# Altium PCB FinalPCB.PcbDoc (part 3 of 4)
Units mm, origin at the board's own origin, x right, y up, seen from the top; angles counter-clockwise.
Board outline 693.67 x 556.39 mm, 2 copper layers (Top Layer, Bottom Layer); 54 components, 53 nets, 276 pads, 0 vias.
Unrouted connection lines stored in the file: 5.
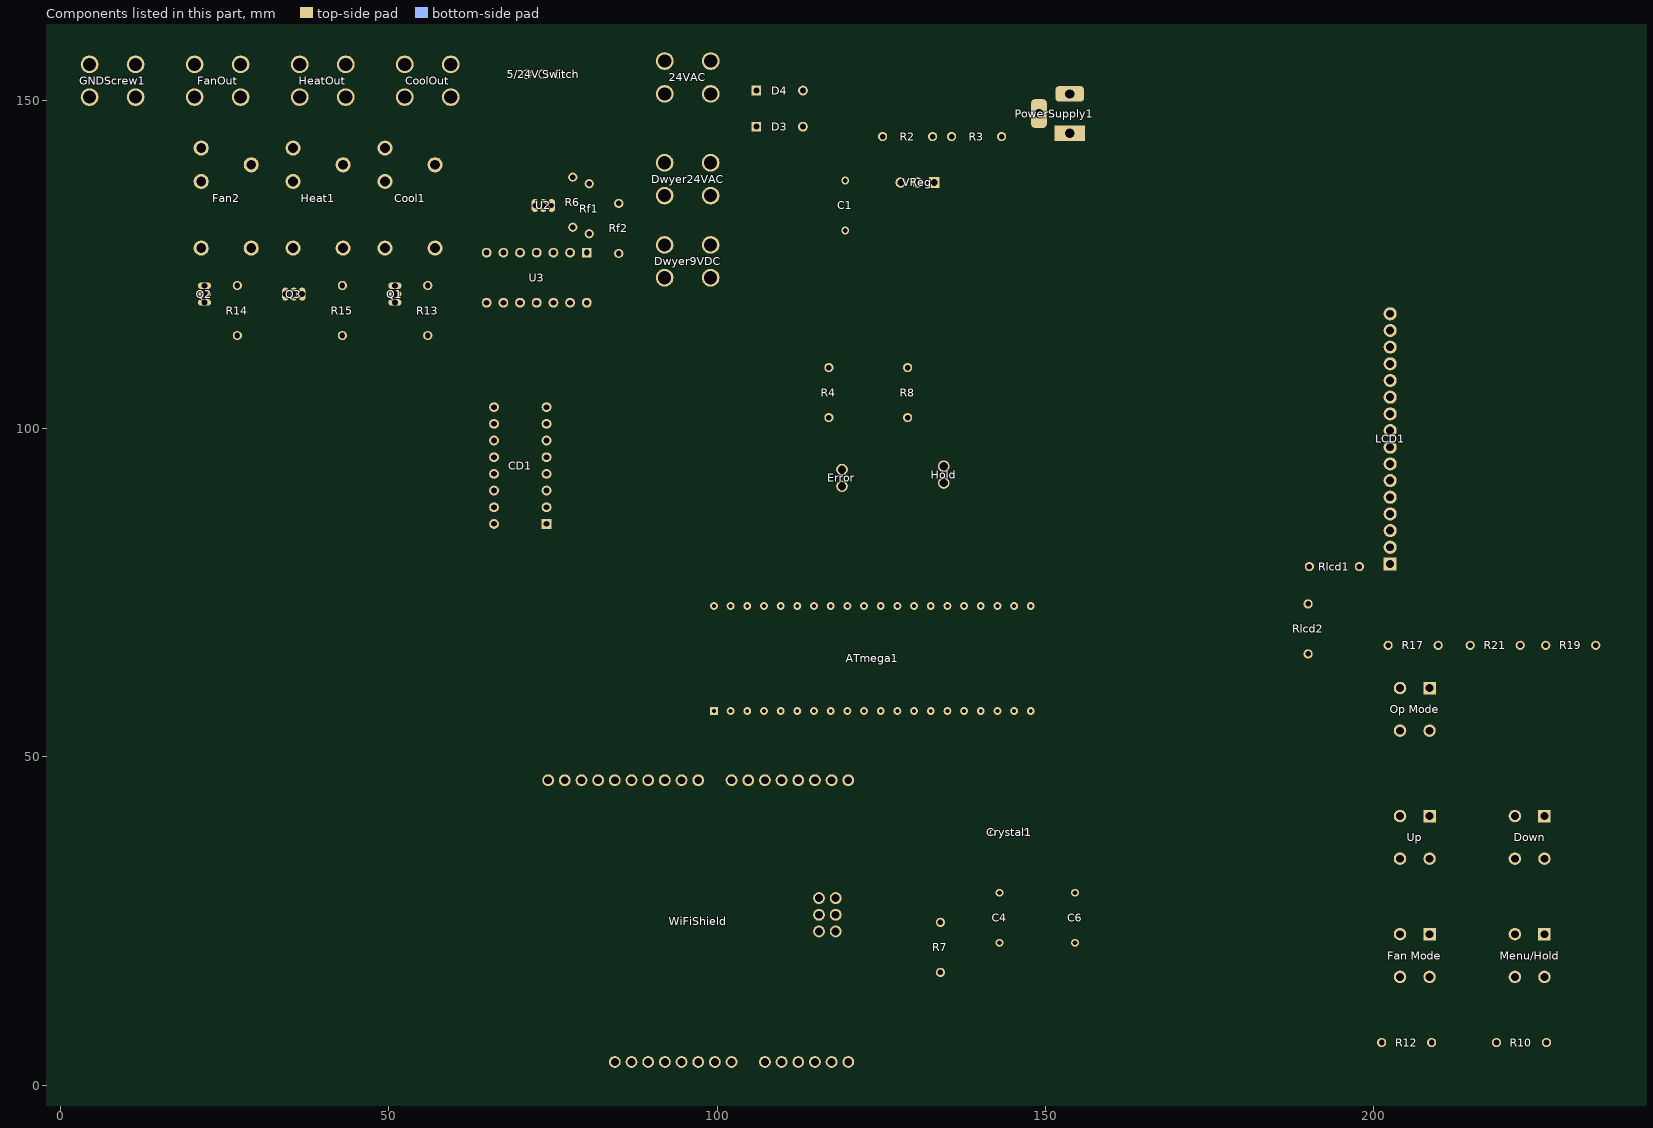
[diagram p3: the components of this part, seen from the top]

## Nets (pads, with @x,y where several pads share a name; then routed paths per layer and width w, separated by ;. In a path a pad name is that pad's centre, name@x,y a point inside that pad or via, vN(x,y) a via of type N, cw(c..) or ccw(c..) an arc to the next point about the centre after c; other vN are vias at no path point) (continued)
copper on no net: (continued)
  Top Layer w0.025: 153.619,115.326 153.619,116.215 ; 153.644,113.624 153.644,114.513 ; 153.644,115.326 153.644,116.215 ; 153.669,113.624 153.669,114.513 ; 153.669,115.326 153.669,116.215 ; 153.695,113.624 153.695,114.513 ; 153.695,115.326 153.695,116.215 ; 153.72,113.624 153.72,114.513 ; 153.72,115.326 153.72,116.215 ; 153.746,113.624 153.746,114.513 ; 153.746,115.326 153.746,116.215 ; 153.746,133.792 153.746,134.782 ; 153.771,113.624 153.771,114.513 ; 153.771,115.326 153.771,116.215 ; 153.771,133.792 153.771,134.782 ; 153.796,113.624 153.796,114.513 ; 153.796,115.326 153.796,116.215 ; 153.796,133.792 153.796,134.782 ; 153.822,113.624 153.822,114.513 ; 153.822,115.326 153.822,116.215 ; 153.822,133.792 153.822,134.782 ; 153.847,113.624 153.847,114.513 ; 153.847,115.326 153.847,116.215 ; 153.847,133.792 153.847,134.782 ; 153.873,113.624 153.873,114.513 ; 153.873,115.326 153.873,116.215 ; 153.873,133.792 153.873,134.782 ; 153.898,113.624 153.898,114.513 ; 153.898,115.326 153.898,116.215 ; 153.898,133.792 153.898,134.782 ; 153.923,113.624 153.923,114.513 ; 153.923,115.326 153.923,116.215 ; 153.923,133.792 153.923,134.782 ; 153.949,113.624 153.949,114.513 ; 153.949,115.326 153.949,116.215 ; 153.949,133.792 153.949,134.782 ; 153.974,113.624 153.974,114.513 ; 153.974,115.326 153.974,116.215 ; 153.974,133.792 153.974,134.782 ; 154,113.624 154,114.513 ; 154,115.326 154,116.215 ; 154,133.792 154,134.782 ; 154.025,113.624 154.025,114.513 ; 154.025,115.326 154.025,116.215 ; 154.025,133.792 154.025,134.782 ; 154.05,113.624 154.05,114.513 ; 154.05,115.326 154.05,116.215 ; 154.05,133.792 154.05,134.782 ; 154.076,113.624 154.076,114.513 ; 154.076,115.326 154.076,116.215 ; 154.076,133.792 154.076,134.782 ; 154.101,113.624 154.101,114.513 ; 154.101,115.326 154.101,116.215 ; 154.101,133.792 154.101,134.782 ; 154.127,113.624 154.127,114.513 ; 154.127,115.326 154.127,116.215 ; 154.127,133.792 154.127,134.782 ; 154.152,113.624 154.152,114.513 ; 154.152,115.326 154.152,116.215 ; 154.152,133.792 154.152,134.782 ; 154.177,113.624 154.177,114.513 ; 154.177,115.326 154.177,116.215 ; 154.177,133.589 154.177,135.189 ; 154.203,113.624 154.203,114.513 ; 154.203,115.326 154.203,116.215 ; 154.203,133.589 154.203,135.189 ; 154.228,113.624 154.228,114.513 ; 154.228,115.326 154.228,116.215 ; 154.228,133.589 154.228,135.189 ; 154.254,113.624 154.254,114.513 ; 154.254,115.326 154.254,116.215 ; 154.254,133.589 154.254,135.189 ; 154.279,113.624 154.279,114.513 ; 154.279,115.326 154.279,116.215 ; 154.279,133.487 154.279,135.29 ; 154.304,113.624 154.304,114.513 ; 154.304,115.326 154.304,116.215 ; 154.304,133.487 154.304,135.29 ; 154.33,113.624 154.33,114.513 ; 154.33,115.326 154.33,116.215 ; 154.33,133.487 154.33,135.29 ; 154.355,113.624 154.355,114.513 ; 154.355,115.326 154.355,116.215 ; 154.355,133.487 154.355,135.29 ; 154.381,113.624 154.381,114.513 ; 154.381,115.326 154.381,116.215 ; 154.381,133.487 154.381,135.29 ; 154.406,113.624 154.406,114.513 ; 154.406,115.326 154.406,116.215 ; 154.406,133.487 154.406,135.29 ; 154.431,113.624 154.431,114.513 ; 154.431,115.326 154.431,116.215 ; 154.431,133.487 154.431,135.29 ; 154.457,113.624 154.457,114.513 ; 154.457,115.326 154.457,116.215 ; 154.457,133.487 154.457,135.29 ; 154.482,113.624 154.482,114.513 ; 154.482,115.326 154.482,116.215 ; 154.482,133.487 154.482,135.29 ; 154.508,113.624 154.508,114.513 ; 154.508,115.326 154.508,116.215 ; 154.508,133.487 154.508,135.29 ; 154.533,113.624 154.533,114.513 ; 154.533,115.326 154.533,116.215 ; 154.533,133.487 154.533,135.29 ; 154.558,113.624 154.558,114.513 ; 154.558,115.326 154.558,116.215 ; 154.558,133.487 154.558,135.29 ; 154.584,113.624 154.584,114.513 ; 154.584,115.326 154.584,116.215 ; 154.584,133.487 154.584,135.29 ; 154.609,113.624 154.609,114.513 ; 154.609,115.326 154.609,116.215 ; 154.609,133.487 154.609,135.29 ; 154.635,113.624 154.635,114.513 ; 154.635,115.326 154.635,116.215 ; 154.635,133.487 154.635,135.29 ; 154.66,113.624 154.66,114.513 ; 154.66,115.326 154.66,116.215 ; 154.66,133.487 154.66,135.29 ; 154.685,113.624 154.685,114.513 ; 154.685,115.326 154.685,116.215 ; 154.685,133.487 154.685,135.29 ; 154.711,113.624 154.711,114.513 ; 154.711,115.326 154.711,116.215 ; 154.711,133.487 154.711,135.29 ; 154.736,113.624 154.736,114.513 ; 154.736,115.326 154.736,116.215 ; 154.736,133.487 154.736,135.29 ; 154.762,113.624 154.762,114.513 ; 154.762,115.326 154.762,116.215 ; 154.762,133.487 154.762,135.29 ; 154.787,113.624 154.787,114.513 ; 154.787,115.326 154.787,116.215 ; 154.787,133.487 154.787,135.29 ; 154.812,113.624 154.812,135.29 ; 154.838,113.624 154.838,135.29 ; 154.863,113.624 154.863,135.29 ; 154.889,113.624 154.889,135.29 ; 154.914,113.624 154.914,135.29 ; 154.939,113.624 154.939,135.29 ; 154.965,113.624 154.965,135.29 ; 154.99,113.624 154.99,135.29 ; 155.016,113.624 155.016,135.29 ; 155.041,113.624 155.041,135.29 ; 155.066,113.624 155.066,135.29 ; 155.092,113.624 155.092,135.29 ; 155.117,113.624 155.117,135.29 ; 155.143,113.624 155.143,135.29 ; 155.168,113.624 155.168,135.29 ; 155.193,113.624 155.193,135.29 ; 155.219,113.624 155.219,135.29 ; 155.244,113.624 155.244,135.29 ; 155.27,113.624 155.27,135.29 ; 155.295,113.624 155.295,135.29 ; 155.32,113.624 155.32,135.29 ; 155.346,113.624 155.346,135.29 ; 155.371,113.624 155.371,135.29 ; 155.397,113.624 155.397,135.29 ; 155.422,113.624 155.422,135.29 ; 155.447,113.624 155.447,114.513 ; 155.447,115.326 155.447,116.215 ; 155.447,133.487 155.447,135.189 ; 155.473,113.624 155.473,114.513 ; 155.473,115.326 155.473,116.215 ; 155.473,133.487 155.473,135.189 ; 155.498,113.624 155.498,114.513 ; 155.498,115.326 155.498,116.215 ; 155.498,133.487 155.498,135.189 ; 155.524,113.624 155.524,114.513 ; 155.524,115.326 155.524,116.215 ; 155.524,133.487 155.524,135.189 ; 155.549,113.624 155.549,114.513 ; 155.549,115.326 155.549,116.215 ; 155.549,133.487 155.549,135.189 ; 155.574,113.624 155.574,114.513 ; 155.574,115.326 155.574,116.215 ; 155.574,133.487 155.574,135.189 ; 155.6,113.624 155.6,114.513 ; 155.6,115.326 155.6,116.215 ; 155.6,133.487 155.6,135.189 ; 155.625,113.624 155.625,114.513 ; 155.625,115.326 155.625,116.215 ; 155.625,133.487 155.625,135.189 ; 155.651,113.624 155.651,114.513 ; 155.651,115.326 155.651,116.215 ; 155.651,133.487 155.651,135.189 ; 155.676,113.624 155.676,114.513 ; 155.676,115.326 155.676,116.215 ; 155.676,133.487 155.676,135.189 ; 155.701,113.624 155.701,114.513 ; 155.701,115.326 155.701,116.215 ; 155.701,133.487 155.701,135.189 ; 155.727,113.624 155.727,114.513 ; 155.727,115.326 155.727,116.215 ; 155.727,133.487 155.727,135.189 ; 155.752,113.624 155.752,114.513 ; 155.752,115.326 155.752,116.215 ; 155.752,133.487 155.752,135.189 ; 155.778,113.624 155.778,114.513 ; 155.778,115.326 155.778,116.215 ; 155.778,133.487 155.778,135.189 ; 155.803,113.624 155.803,114.513 ; 155.803,115.326 155.803,116.215 ; 155.803,133.487 155.803,135.189 ; 155.828,113.624 155.828,114.513 ; 155.828,115.326 155.828,116.215 ; 155.828,133.487 155.828,135.189 ; 155.854,113.624 155.854,114.513 ; 155.854,115.326 155.854,116.215 ; 155.854,133.487 155.854,135.189 ; 155.879,113.624 155.879,114.513 ; 155.879,115.326 155.879,116.215 ; 155.879,117.409 155.879,118.78 ; 155.879,118.984 155.879,119.288 ; 155.879,130.109 155.879,130.82 ; 155.879,133.487 155.879,135.189 ; 155.905,113.624 155.905,114.513 ; 155.905,115.326 155.905,116.215 ; 155.905,117.409 155.905,118.78 ; 155.905,118.984 155.905,119.288 ; 155.905,130.109 155.905,130.82 ; 155.905,133.487 155.905,135.189 ; 155.93,113.624 155.93,114.513 ; 155.93,115.326 155.93,116.215 ; 155.93,117.409 155.93,118.78 ; 155.93,118.984 155.93,119.288 ; 155.93,130.109 155.93,130.82 ; 155.93,133.487 155.93,135.189 ; 155.955,113.624 155.955,114.513 ; 155.955,115.326 155.955,116.215 ; 155.955,117.409 155.955,118.78 ; 155.955,118.984 155.955,119.288 ; 155.955,130.109 155.955,130.82 ; 155.955,133.487 155.955,135.189 ; 155.981,113.624 155.981,114.513 ; 155.981,115.326 155.981,116.215 ; 155.981,117.409 155.981,118.78 ; 155.981,118.984 155.981,119.288 ; 155.981,130.109 155.981,130.82 ; 155.981,133.487 155.981,135.189 ; 156.006,113.624 156.006,114.513 ; 156.006,115.326 156.006,116.215 ; 156.006,117.409 156.006,118.78 ; 156.006,118.984 156.006,119.288 ; 156.006,130.109 156.006,130.82 ; 156.006,133.487 156.006,135.189 ; 156.032,113.624 156.032,114.513 ; 156.032,115.326 156.032,116.215 ; 156.032,117.409 156.032,118.78 ; 156.032,118.984 156.032,119.288 ; 156.032,130.109 156.032,130.82 ; 156.032,133.487 156.032,135.189 ; 156.057,113.624 156.057,114.513 ; 156.057,115.326 156.057,116.215 ; 156.057,117.409 156.057,118.78 ; 156.057,118.984 156.057,119.288 ; 156.057,130.109 156.057,130.82 ; 156.057,133.487 156.057,135.189 ; 156.082,113.624 156.082,114.513 ; 156.082,115.326 156.082,116.215 ; 156.082,117.409 156.082,118.78 ; 156.082,118.984 156.082,119.288 ; 156.082,130.109 156.082,130.82 ; 156.082,133.487 156.082,135.189 ; 156.108,113.624 156.108,114.513 ; 156.108,115.326 156.108,116.215 ; 156.108,117.409 156.108,118.78 ; 156.108,118.984 156.108,119.288 ; 156.108,130.109 156.108,130.82 ; 156.108,133.487 156.108,135.189 ; 156.133,113.624 156.133,114.513 ; 156.133,115.326 156.133,116.215 ; 156.133,117.409 156.133,118.78 ; 156.133,118.984 156.133,119.288 ; 156.133,130.109 156.133,130.82 ; 156.133,133.487 156.133,135.189 ; 156.159,113.624 156.159,114.513 ; 156.159,115.326 156.159,116.215 ; 156.159,117.409 156.159,118.78 ; 156.159,118.984 156.159,119.288 ; 156.159,130.109 156.159,130.82 ; 156.159,133.487 156.159,135.189 ; 156.184,113.624 156.184,114.513 ; 156.184,115.326 156.184,116.215 ; 156.184,117.409 156.184,118.78 ; 156.184,118.984 156.184,119.288 ; 156.184,130.109 156.184,130.82 ; 156.184,133.487 156.184,135.189 ; 156.209,113.624 156.209,114.513 ; 156.209,115.326 156.209,116.215 ; 156.209,117.409 156.209,118.78 ; 156.209,118.984 156.209,119.288 ; 156.209,130.109 156.209,130.82 ; 156.209,133.487 156.209,135.189 ; 156.235,113.624 156.235,114.513 ; 156.235,115.326 156.235,116.215 ; 156.235,117.409 156.235,118.78 ; 156.235,118.984 156.235,119.288 ; 156.235,130.109 156.235,130.82 ; 156.235,133.487 156.235,135.189 ; 156.26,113.624 156.26,114.513 ; 156.26,115.326 156.26,116.215 ; 156.26,117.409 156.26,118.78 ; 156.26,118.984 156.26,119.288 ; 156.26,130.109 156.26,130.82 ; 156.26,133.487 156.26,135.189 ; 156.286,113.624 156.286,114.513 ; 156.286,115.326 156.286,116.215 ; 156.286,117.409 156.286,118.78 ; 156.286,118.984 156.286,119.288 ; 156.286,130.109 156.286,130.82 ; 156.286,133.487 156.286,135.189 ; 156.311,113.624 156.311,114.513 ; 156.311,115.326 156.311,116.215 ; 156.311,117.409 156.311,118.78 ; 156.311,118.984 156.311,119.288 ; 156.311,123.556 156.311,123.962 ; 156.311,130.109 156.311,130.82 ; 156.311,133.792 156.311,134.782 ; 156.336,113.624 156.336,114.513 ; 156.336,115.326 156.336,116.215 ; 156.336,117.409 156.336,118.78 ; 156.336,118.984 156.336,119.288 ; 156.336,123.556 156.336,123.962 ; 156.336,130.109 156.336,130.82 ; 156.336,133.792 156.336,134.782 ; 156.362,113.624 156.362,114.513 ; 156.362,115.326 156.362,116.215 ; 156.362,117.409 156.362,118.78 ; 156.362,118.984 156.362,119.288 ; 156.362,123.556 156.362,123.962 ; 156.362,130.109 156.362,130.82 ; 156.362,133.792 156.362,134.782 ; 156.387,113.624 156.387,114.513 ; 156.387,115.326 156.387,116.215 ; 156.387,117.409 156.387,118.78 ; 156.387,118.984 156.387,119.288 ; 156.387,123.556 156.387,123.962 ; 156.387,130.109 156.387,130.82 ; 156.387,133.792 156.387,134.782 ; 156.413,113.624 156.413,114.513 ; 156.413,115.326 156.413,116.215 ; 156.413,117.409 156.413,117.891 ; 156.413,118.984 156.413,119.288 ; 156.413,123.556 156.413,123.962 ; 156.438,113.624 156.438,114.513 ; 156.438,115.326 156.438,116.215 ; 156.438,117.409 156.438,117.891 ; 156.438,118.984 156.438,119.288 ; 156.438,123.556 156.438,123.962 ; 156.463,113.624 156.463,114.513 ; 156.463,115.326 156.463,116.215 ; 156.463,117.409 156.463,117.891 ; 156.463,118.984 156.463,119.288 ; 156.463,123.556 156.463,123.962 ; 156.489,113.624 156.489,114.513 ; 156.489,115.326 156.489,116.215 ; 156.489,117.409 156.489,117.891 ; 156.489,118.984 156.489,119.288 ; 156.489,123.556 156.489,123.962 ; 156.514,113.624 156.514,114.513 ; 156.514,115.326 156.514,116.215 ; 156.514,117.409 156.514,117.891 ; 156.514,118.984 156.514,119.288 ; 156.514,123.556 156.514,123.962 ; 156.54,113.624 156.54,114.513 ; 156.54,115.326 156.54,116.215 ; 156.54,117.409 156.54,117.891 ; 156.54,118.984 156.54,119.288 ; 156.54,123.556 156.54,123.962 ; 156.565,113.624 156.565,114.513 ; 156.565,115.326 156.565,116.215 ; 156.565,117.409 156.565,117.891 ; 156.565,118.984 156.565,119.288 ; 156.565,123.556 156.565,123.962 ; 156.59,113.624 156.59,114.513 ; 156.59,115.326 156.59,116.215 ; 156.59,117.409 156.59,117.891 ; 156.59,118.984 156.59,119.288 ; 156.59,123.556 156.59,123.962 ; 156.616,113.624 156.616,114.513 ; 156.616,115.326 156.616,116.215 ; 156.616,117.409 156.616,117.891 ; 156.616,118.984 156.616,119.288 ; 156.616,123.556 156.616,123.962 ; 156.641,113.624 156.641,114.513 ; 156.641,115.326 156.641,116.215 ; 156.641,117.409 156.641,117.891 ; 156.641,118.984 156.641,119.288 ; 156.641,123.556 156.641,123.962 ; 156.667,113.624 156.667,114.513 ; 156.667,115.326 156.667,116.215 ; 156.667,117.409 156.667,117.891 ; 156.667,118.984 156.667,119.288 ; 156.667,123.556 156.667,123.962 ; 156.692,113.624 156.692,114.513 ; 156.692,115.326 156.692,116.215 ; 156.692,117.409 156.692,117.891 ; 156.692,118.984 156.692,119.288 ; 156.692,123.556 156.692,123.962 ; 156.717,113.624 156.717,114.513 ; 156.717,115.326 156.717,116.215 ; 156.717,117.409 156.717,117.891 ; 156.717,118.984 156.717,119.288 ; 156.717,123.556 156.717,123.962 ; 156.743,113.624 156.743,114.513 ; 156.743,115.326 156.743,116.215 ; 156.743,117.409 156.743,117.891 ; 156.743,118.984 156.743,119.288 ; 156.743,123.556 156.743,123.962 ; 156.768,113.624 156.768,114.513 ; 156.768,115.326 156.768,116.215 ; 156.768,117.409 156.768,117.891 ; 156.768,118.984 156.768,119.288 ; 156.768,123.556 156.768,123.962 ; 156.794,113.624 156.794,114.513 ; 156.794,115.326 156.794,116.215 ; 156.794,117.409 156.794,117.891 ; 156.794,118.984 156.794,119.288 ; 156.794,123.556 156.794,123.962 ; 156.819,113.624 156.819,114.513 ; 156.819,115.326 156.819,116.215 ; 156.819,117.409 156.819,117.891 ; 156.819,118.984 156.819,119.288 ; 156.819,123.556 156.819,123.962 ; 156.844,113.624 156.844,114.513 ; 156.844,115.326 156.844,116.215 ; 156.844,117.409 156.844,117.891 ; 156.844,118.984 156.844,119.288 ; 156.844,120.177 156.844,121.168 ; 156.844,121.879 156.844,123.175 ; 156.844,123.251 156.844,124.368 ; 156.844,124.749 156.844,125.74 ; 156.844,126.248 156.844,127.442 ; 156.844,128.229 156.844,129.728 ; 156.844,130.109 156.844,130.82 ; 156.844,131.404 156.844,132.115 ; 156.844,132.598 156.844,133.792 ; 156.87,113.624 156.87,114.513 ; 156.87,115.326 156.87,116.215 ; 156.87,117.409 156.87,117.891 ; 156.87,118.984 156.87,119.288 ; 156.87,120.177 156.87,121.168 ; 156.87,121.879 156.87,123.175 ; 156.87,123.251 156.87,124.368 ; 156.87,124.749 156.87,125.74 ; 156.87,126.248 156.87,127.442 ; 156.87,128.229 156.87,129.728 ; 156.87,130.109 156.87,130.82 ; 156.87,131.404 156.87,132.115 ; 156.87,132.598 156.87,133.792 ; 156.895,113.624 156.895,114.513 ; 156.895,115.326 156.895,116.215 ; 156.895,117.409 156.895,117.891 ; 156.895,118.984 156.895,119.288 ; 156.895,120.177 156.895,121.168 ; 156.895,121.879 156.895,123.175 ; 156.895,123.251 156.895,124.368 ; 156.895,124.749 156.895,125.74 ; 156.895,126.248 156.895,127.442 ; 156.895,128.229 156.895,129.728 ; 156.895,130.109 156.895,130.82 ; 156.895,131.404 156.895,132.115 ; 156.895,132.598 156.895,133.792 ; 156.921,113.624 156.921,114.513 ; 156.921,115.326 156.921,116.215 ; 156.921,117.409 156.921,117.891 ; 156.921,118.984 156.921,119.288 ; 156.921,120.177 156.921,121.168 ; 156.921,121.879 156.921,123.175 ; 156.921,123.251 156.921,124.368 ; 156.921,124.749 156.921,125.74 ; 156.921,126.248 156.921,127.442 ; 156.921,128.229 156.921,129.728 ; 156.921,130.109 156.921,130.82 ; 156.921,131.404 156.921,132.115 ; 156.921,132.598 156.921,133.792 ; 156.946,113.624 156.946,114.513 ; 156.946,115.326 156.946,116.215 ; 156.946,117.409 156.946,117.891 ; 156.946,118.984 156.946,119.288 ; 156.946,120.177 156.946,121.168 ; 156.946,121.879 156.946,123.175 ; 156.946,123.251 156.946,124.368 ; 156.946,124.749 156.946,125.74 ; 156.946,126.248 156.946,127.442 ; 156.946,128.229 156.946,129.728 ; 156.946,130.109 156.946,130.82 ; 156.946,131.404 156.946,132.115 ; 156.946,132.598 156.946,133.792 ; 156.971,113.624 156.971,114.513 ; 156.971,115.326 156.971,116.215 ; 156.971,117.409 156.971,117.891 ; 156.971,118.984 156.971,119.288 ; 156.971,120.177 156.971,121.168 ; 156.971,121.879 156.971,123.175 ; 156.971,123.251 156.971,124.368 ; 156.971,124.749 156.971,125.74 ; 156.971,126.248 156.971,127.442 ; 156.971,128.229 156.971,129.728 ; 156.971,130.109 156.971,130.82 ; 156.971,131.404 156.971,132.115 ; 156.971,132.598 156.971,133.792 ; 156.997,113.624 156.997,114.513 ; 156.997,115.326 156.997,116.215 ; 156.997,117.409 156.997,117.891 ; 156.997,118.984 156.997,119.288 ; 156.997,120.177 156.997,121.168 ; 156.997,121.879 156.997,123.175 ; 156.997,123.251 156.997,124.368 ; 156.997,124.749 156.997,125.74 ; 156.997,126.248 156.997,127.442 ; 156.997,128.229 156.997,129.728 ; 156.997,130.109 156.997,130.82 ; 156.997,131.404 156.997,132.115 ; 156.997,132.598 156.997,133.792 ; 157.022,113.624 157.022,114.513 ; 157.022,115.326 157.022,116.215 ; 157.022,117.409 157.022,117.891 ; 157.022,118.984 157.022,119.288 ; 157.022,120.177 157.022,121.168 ; 157.022,121.879 157.022,123.175 ; 157.022,123.251 157.022,124.368 ; 157.022,124.749 157.022,125.74 ; 157.022,126.248 157.022,127.442 ; 157.022,128.229 157.022,129.728 ; 157.022,130.109 157.022,130.82 ; 157.022,131.404 157.022,132.115 ; 157.022,132.598 157.022,133.792 ; 157.048,113.624 157.048,114.513 ; 157.048,115.326 157.048,116.215 ; 157.048,117.409 157.048,117.891 ; 157.048,118.984 157.048,119.288 ; 157.048,120.177 157.048,121.168 ; 157.048,121.879 157.048,123.175 ; 157.048,123.251 157.048,124.368 ; 157.048,124.749 157.048,125.74 ; 157.048,126.248 157.048,127.442 ; 157.048,128.229 157.048,129.728 ; 157.048,130.109 157.048,130.82 ; 157.048,131.404 157.048,132.115 ; 157.048,132.598 157.048,133.792 ; 157.073,113.624 157.073,114.513 ; 157.073,115.326 157.073,116.215 ; 157.073,117.409 157.073,117.891 ; 157.073,118.984 157.073,119.288 ; 157.073,120.177 157.073,121.168 ; 157.073,121.879 157.073,123.175 ; 157.073,123.251 157.073,124.368 ; 157.073,124.749 157.073,125.74 ; 157.073,126.248 157.073,127.442 ; 157.073,128.229 157.073,129.728 ; 157.073,130.109 157.073,130.82 ; 157.073,131.404 157.073,132.115 ; 157.073,132.598 157.073,133.792 ; 157.098,113.624 157.098,114.513 ; 157.098,115.326 157.098,116.215 ; 157.098,117.409 157.098,117.891 ; 157.098,118.984 157.098,119.288 ; 157.098,120.177 157.098,121.168 ; 157.098,121.879 157.098,123.175 ; 157.098,123.251 157.098,124.368 ; 157.098,124.749 157.098,125.74 ; 157.098,126.248 157.098,127.442 ; 157.098,128.229 157.098,129.728 ; 157.098,130.109 157.098,130.82 ; 157.098,131.404 157.098,132.115 ; 157.098,132.598 157.098,133.792 ; 157.124,113.624 157.124,114.513 ; 157.124,115.326 157.124,116.215 ; 157.124,117.409 157.124,117.891 ; 157.124,118.984 157.124,119.288 ; 157.124,120.177 157.124,121.168 ; 157.124,121.879 157.124,123.175 ; 157.124,123.251 157.124,124.368 ; 157.124,124.749 157.124,125.74 ; 157.124,126.248 157.124,127.442 ; 157.124,128.229 157.124,129.728 ; 157.124,130.109 157.124,130.82 ; 157.124,131.404 157.124,132.115 ; 157.124,132.598 157.124,133.792 ; 157.149,113.624 157.149,114.513 ; 157.149,115.326 157.149,116.215 ; 157.149,117.409 157.149,117.891 ; 157.149,118.984 157.149,119.288 ; 157.149,120.177 157.149,121.168 ; 157.149,121.879 157.149,123.175 ; 157.149,123.251 157.149,124.368 ; 157.149,124.749 157.149,125.74 ; 157.149,126.248 157.149,127.442 ; 157.149,128.229 157.149,129.728 ; 157.149,130.109 157.149,130.82 ; 157.149,131.404 157.149,132.115 ; 157.149,132.598 157.149,133.792 ; 157.175,113.624 157.175,114.513 ; 157.175,115.326 157.175,116.215 ; 157.175,117.409 157.175,118.501 ; 157.175,118.984 157.175,119.288 ; 157.175,120.076 157.175,120.482 ; 157.175,120.889 157.175,121.473 ; 157.175,121.879 157.175,122.565 ; 157.175,122.667 157.175,123.175 ; 157.175,123.556 157.175,123.962 ; 157.175,124.749 157.175,125.359 ; 157.175,126.045 157.175,126.934 ; 157.175,127.035 157.175,127.747 ; 157.175,128.229 157.175,128.432 ; 157.175,129.118 157.175,129.728 ; 157.175,130.109 157.175,130.82 ; 157.175,131.023 157.175,131.506 ; 157.175,131.811 157.175,132.395 ; 157.175,132.598 157.175,133.106 ; 157.175,133.589 157.175,133.792 ; 157.2,113.624 157.2,114.513 ; 157.2,115.326 157.2,116.215 ; 157.2,117.409 157.2,118.501 ; 157.2,118.984 157.2,119.288 ; 157.2,120.076 157.2,120.482 ; 157.2,120.889 157.2,121.473 ; 157.2,121.879 157.2,122.565 ; 157.2,122.667 157.2,123.175 ; 157.2,123.556 157.2,123.962 ; 157.2,124.749 157.2,125.359 ; 157.2,126.045 157.2,126.934 ; 157.2,127.035 157.2,127.747 ; 157.2,128.229 157.2,128.432 ; 157.2,129.118 157.2,129.728 ; 157.2,130.109 157.2,130.82 ; 157.2,131.023 157.2,131.506 ; 157.2,131.811 157.2,132.395 ; 157.2,132.598 157.2,133.106 ; 157.2,133.589 157.2,133.792 ; 157.225,113.624 157.225,114.513 ; 157.225,115.326 157.225,116.215 ; 157.225,117.409 157.225,118.501 ; 157.225,118.984 157.225,119.288 ; 157.225,120.076 157.225,120.482 ; 157.225,120.889 157.225,121.473 ; 157.225,121.879 157.225,122.565 ; 157.225,122.667 157.225,123.175 ; 157.225,123.556 157.225,123.962 ; 157.225,124.749 157.225,125.359 ; 157.225,126.045 157.225,126.934 ; 157.225,127.035 157.225,127.747 ; 157.225,128.229 157.225,128.432 ; 157.225,129.118 157.225,129.728 ; 157.225,130.109 157.225,130.82 ; 157.225,131.023 157.225,131.506 ; 157.225,131.811 157.225,132.395 ; 157.225,132.598 157.225,133.106 ; 157.225,133.589 157.225,133.792 ; 157.251,113.624 157.251,114.513 ; 157.251,115.326 157.251,116.215 ; 157.251,117.409 157.251,118.501 ; 157.251,118.984 157.251,119.288 ; 157.251,120.076 157.251,120.482 ; 157.251,120.889 157.251,121.473 ; 157.251,121.879 157.251,122.565 ; 157.251,122.667 157.251,123.175 ; 157.251,123.556 157.251,123.962 ; 157.251,124.749 157.251,125.359 ; 157.251,126.045 157.251,126.934 ; 157.251,127.035 157.251,127.747 ; 157.251,128.229 157.251,128.432 ; 157.251,129.118 157.251,129.728 ; 157.251,130.109 157.251,130.82 ; 157.251,131.023 157.251,131.506 ; 157.251,131.811 157.251,132.395 ; 157.251,132.598 157.251,133.106 ; 157.251,133.589 157.251,133.792 ; 157.276,113.624 157.276,114.513 ; 157.276,115.326 157.276,116.215 ; 157.276,117.409 157.276,118.501 ; 157.276,118.984 157.276,119.288 ; 157.276,120.076 157.276,120.482 ; 157.276,120.889 157.276,121.473 ; 157.276,121.879 157.276,122.565 ; 157.276,122.667 157.276,123.175 ; 157.276,123.556 157.276,123.962 ; 157.276,124.749 157.276,125.359 ; 157.276,126.045 157.276,126.934 ; 157.276,127.035 157.276,127.747 ; 157.276,128.229 157.276,128.432 ; 157.276,129.118 157.276,129.728 ; 157.276,130.109 157.276,130.82 ; 157.276,131.023 157.276,131.506 ; 157.276,131.811 157.276,132.395 ; 157.276,132.598 157.276,133.106 ; 157.276,133.589 157.276,133.792 ; 157.302,113.624 157.302,114.513 ; 157.302,115.326 157.302,116.215 ; 157.302,117.409 157.302,118.501 ; 157.302,118.984 157.302,119.288 ; 157.302,120.076 157.302,120.482 ; 157.302,120.889 157.302,121.473 ; 157.302,121.879 157.302,122.565 ; 157.302,122.667 157.302,123.175 ; 157.302,123.556 157.302,123.962 ; 157.302,124.749 157.302,125.359 ; 157.302,126.045 157.302,126.934 ; 157.302,127.035 157.302,127.747 ; 157.302,128.229 157.302,128.432 ; 157.302,129.118 157.302,129.728 ; 157.302,130.109 157.302,130.82 ; 157.302,131.023 157.302,131.506 ; 157.302,131.811 157.302,132.395 ; 157.302,132.598 157.302,133.106 ; 157.302,133.589 157.302,133.792 ; 157.327,113.624 157.327,114.513 ; 157.327,115.326 157.327,116.215 ; 157.327,117.409 157.327,118.501 ; 157.327,118.984 157.327,119.288 ; 157.327,120.076 157.327,120.482 ; 157.327,120.889 157.327,121.473 ; 157.327,121.879 157.327,122.565 ; 157.327,122.667 157.327,123.175 ; 157.327,123.556 157.327,123.962 ; 157.327,124.749 157.327,125.359 ; 157.327,126.045 157.327,126.934 ; 157.327,127.035 157.327,127.747 ; 157.327,128.229 157.327,128.432 ; 157.327,129.118 157.327,129.728 ; 157.327,130.109 157.327,130.82 ; 157.327,131.023 157.327,131.506 ; 157.327,131.811 157.327,132.395 ; 157.327,132.598 157.327,133.106 ; 157.327,133.589 157.327,133.792 ; 157.352,113.624 157.352,114.513 ; 157.352,115.326 157.352,116.215 ; 157.352,117.409 157.352,118.501 ; 157.352,118.984 157.352,119.288 ; 157.352,120.076 157.352,120.482 ; 157.352,120.889 157.352,121.473 ; 157.352,121.879 157.352,122.565 ; 157.352,122.667 157.352,123.175 ; 157.352,123.556 157.352,123.962 ; 157.352,124.749 157.352,125.359 ; 157.352,126.045 157.352,126.934 ; 157.352,127.035 157.352,127.747 ; 157.352,128.229 157.352,128.432 ; 157.352,129.118 157.352,129.728 ; 157.352,130.109 157.352,130.82 ; 157.352,131.023 157.352,131.506 ; 157.352,131.811 157.352,132.395 ; 157.352,132.598 157.352,133.106 ; 157.352,133.589 157.352,133.792 ; 157.378,113.624 157.378,114.513 ; 157.378,115.326 157.378,116.215 ; 157.378,117.409 157.378,118.501 ; 157.378,118.984 157.378,119.288 ; 157.378,120.076 157.378,120.482 ; 157.378,120.889 157.378,121.473 ; 157.378,121.879 157.378,122.565 ; 157.378,122.667 157.378,123.175 ; 157.378,123.556 157.378,123.962 ; 157.378,124.749 157.378,125.359 ; 157.378,126.045 157.378,126.934 ; 157.378,127.035 157.378,127.747 ; 157.378,128.229 157.378,128.432 ; 157.378,129.118 157.378,129.728 ; 157.378,130.109 157.378,130.82 ; 157.378,131.023 157.378,131.506 ; 157.378,131.811 157.378,132.395 ; 157.378,132.598 157.378,133.106 ; 157.378,133.589 157.378,133.792 ; 157.403,113.624 157.403,114.513 ; 157.403,115.326 157.403,116.215 ; 157.403,117.409 157.403,118.501 ; 157.403,118.984 157.403,119.288 ; 157.403,120.076 157.403,120.177 ; 157.403,121.168 157.403,121.473 ; 157.403,121.778 157.403,121.981 ; 157.403,123.556 157.403,123.962 ; 157.403,124.749 157.403,124.953 ; 157.403,126.045 157.403,126.35 ; 157.403,127.137 157.403,127.747 ; 157.403,128.229 157.403,128.432 ; 157.403,129.118 157.403,129.728 ; 157.403,130.109 157.403,130.82 ; 157.403,130.922 157.403,131.404 ; 157.403,132.598 157.403,133.106 ; 157.429,113.624 157.429,114.513 ; 157.429,115.326 157.429,116.215 ; 157.429,117.409 157.429,118.501 ; 157.429,118.984 157.429,119.288 ; 157.429,120.076 157.429,120.177 ; 157.429,121.168 157.429,121.473 ; 157.429,121.778 157.429,121.981 ; 157.429,123.556 157.429,123.962 ; 157.429,124.749 157.429,124.953 ; 157.429,126.045 157.429,126.35 ; 157.429,127.137 157.429,127.747 ; 157.429,128.229 157.429,128.432 ; 157.429,129.118 157.429,129.728 ; 157.429,130.109 157.429,130.82 ; 157.429,130.922 157.429,131.404 ; 157.429,132.598 157.429,133.106 ; 157.454,113.624 157.454,114.513 ; 157.454,115.326 157.454,116.215 ; 157.454,117.409 157.454,118.501 ; 157.454,118.984 157.454,119.288 ; 157.454,120.076 157.454,120.177 ; 157.454,121.168 157.454,121.473 ; 157.454,121.778 157.454,121.981 ; 157.454,123.556 157.454,123.962 ; 157.454,124.749 157.454,124.953 ; 157.454,126.045 157.454,126.35 ; 157.454,127.137 157.454,127.747 ; 157.454,128.229 157.454,128.432 ; 157.454,129.118 157.454,129.728 ; 157.454,130.109 157.454,130.82 ; 157.454,130.922 157.454,131.404 ; 157.454,132.598 157.454,133.106 ; 157.479,113.624 157.479,114.513 ; 157.479,115.326 157.479,116.215 ; 157.479,117.409 157.479,118.501 ; 157.479,118.984 157.479,119.288 ; 157.479,120.076 157.479,120.177 ; 157.479,121.168 157.479,121.473 ; 157.479,121.778 157.479,121.981 ; 157.479,123.556 157.479,123.962 ; 157.479,124.749 157.479,124.953 ; 157.479,126.045 157.479,126.35 ; 157.479,127.137 157.479,127.747 ; 157.479,128.229 157.479,128.432 ; 157.479,129.118 157.479,129.728 ; 157.479,130.109 157.479,130.82 ; 157.479,130.922 157.479,131.404 ; 157.479,132.598 157.479,133.106 ; 157.505,113.624 157.505,114.513 ; 157.505,115.326 157.505,116.215 ; 157.505,117.409 157.505,118.501 ; 157.505,118.984 157.505,119.288 ; 157.505,120.076 157.505,120.177 ; 157.505,121.168 157.505,121.473 ; 157.505,121.778 157.505,121.981 ; 157.505,123.556 157.505,123.962 ; 157.505,124.749 157.505,124.953 ; 157.505,126.045 157.505,126.35 ; 157.505,127.137 157.505,127.747 ; 157.505,128.229 157.505,128.432 ; 157.505,129.118 157.505,129.728 ; 157.505,130.109 157.505,130.82 ; 157.505,130.922 157.505,131.404 ; 157.505,132.598 157.505,133.106 ; 157.53,113.624 157.53,114.513 ; 157.53,115.326 157.53,116.215 ; 157.53,117.409 157.53,118.501 ; 157.53,118.984 157.53,119.288 ; 157.53,120.076 157.53,120.177 ; 157.53,121.168 157.53,121.473 ; 157.53,121.778 157.53,121.981 ; 157.53,123.556 157.53,123.962 ; 157.53,124.749 157.53,124.953 ; 157.53,126.045 157.53,126.35 ; 157.53,127.137 157.53,127.747 ; 157.53,128.229 157.53,128.432 ; 157.53,129.118 157.53,129.728 ; 157.53,130.109 157.53,130.82 ; 157.53,130.922 157.53,131.404 ; 157.53,132.598 157.53,133.106 ; 157.556,113.624 157.556,114.513 ; 157.556,115.326 157.556,116.215 ; 157.556,117.409 157.556,118.501 ; 157.556,118.984 157.556,119.288 ; 157.556,120.076 157.556,120.177 ; 157.556,121.168 157.556,121.473 ; 157.556,121.778 157.556,121.981 ; 157.556,123.556 157.556,123.962 ; 157.556,124.749 157.556,124.953 ; 157.556,126.045 157.556,126.35 ; 157.556,127.137 157.556,127.747 ; 157.556,128.229 157.556,128.432 ; 157.556,129.118 157.556,129.728 ; 157.556,130.109 157.556,130.82 ; 157.556,130.922 157.556,131.404 ; 157.556,132.598 157.556,133.106 ; 157.581,113.624 157.581,114.513 ; 157.581,115.326 157.581,116.215 ; 157.581,117.409 157.581,118.501 ; 157.581,118.984 157.581,119.288 ; 157.581,120.076 157.581,120.177 ; 157.581,121.168 157.581,121.473 ; 157.581,121.778 157.581,121.981 ; 157.581,123.556 157.581,123.962 ; 157.581,124.749 157.581,124.953 ; 157.581,126.045 157.581,126.35 ; 157.581,127.137 157.581,127.747 ; 157.581,128.229 157.581,128.432 ; 157.581,129.118 157.581,129.728 ; 157.581,130.109 157.581,130.82 ; 157.581,130.922 157.581,131.404 ; 157.581,132.598 157.581,133.106 ; 157.606,113.624 157.606,114.513 ; 157.606,115.326 157.606,116.215 ; 157.606,117.409 157.606,118.501 ; 157.606,118.984 157.606,119.288 ; 157.606,120.076 157.606,120.177 ; 157.606,121.168 157.606,121.473 ; 157.606,121.778 157.606,121.981 ; 157.606,123.556 157.606,123.962 ; 157.606,124.749 157.606,124.953 ; 157.606,126.045 157.606,126.35 ; 157.606,127.137 157.606,127.747 ; 157.606,128.229 157.606,128.432 ; 157.606,129.118 157.606,129.728 ; 157.606,130.109 157.606,130.82 ; 157.606,130.922 157.606,131.404 ; 157.606,132.598 157.606,133.106 ; 157.632,113.624 157.632,114.513 ; 157.632,115.326 157.632,116.215 ; 157.632,117.409 157.632,118.501 ; 157.632,118.984 157.632,119.288 ; 157.632,120.076 157.632,120.177 ; 157.632,121.168 157.632,121.473 ; 157.632,121.778 157.632,121.981 ; 157.632,123.556 157.632,123.962 ; 157.632,124.749 157.632,124.953 ; 157.632,126.045 157.632,126.35 ; 157.632,127.137 157.632,127.747 ; 157.632,128.229 157.632,128.432 ; 157.632,129.118 157.632,129.728 ; 157.632,130.109 157.632,130.82 ; 157.632,130.922 157.632,131.404 ; 157.632,132.598 157.632,133.106 ; 157.657,113.624 157.657,114.513 ; 157.657,115.326 157.657,116.215 ; 157.657,117.409 157.657,118.501 ; 157.657,118.984 157.657,119.288 ; 157.657,120.076 157.657,120.177 ; 157.657,121.168 157.657,121.473 ; 157.657,121.778 157.657,121.981 ; 157.657,123.556 157.657,123.962 ; 157.657,124.749 157.657,124.953 ; 157.657,126.045 157.657,126.35 ; 157.657,127.137 157.657,127.747 ; 157.657,128.229 157.657,128.432 ; 157.657,129.118 157.657,129.728 ; 157.657,130.109 157.657,130.82 ; 157.657,130.922 157.657,131.404 ; 157.657,132.598 157.657,133.106 ; 157.683,113.624 157.683,114.513 ; 157.683,115.326 157.683,116.215 ; 157.683,117.409 157.683,118.501 ; 157.683,118.984 157.683,119.288 ; 157.683,120.076 157.683,120.177 ; 157.683,121.168 157.683,121.473 ; 157.683,121.778 157.683,121.981 ; 157.683,123.556 157.683,123.962 ; 157.683,124.749 157.683,124.953 ; 157.683,126.045 157.683,126.35 ; 157.683,127.137 157.683,127.747 ; 157.683,128.229 157.683,128.432 ; 157.683,129.118 157.683,129.728 ; 157.683,130.109 157.683,130.82 ; 157.683,130.922 157.683,131.404 ; 157.683,132.598 157.683,133.106 ; 157.708,113.624 157.708,114.513 ; 157.708,115.326 157.708,116.215 ; 157.708,117.409 157.708,117.891 ; 157.708,118.984 157.708,119.288 ; 157.708,119.796 157.708,121.473 ; 157.708,121.778 157.708,121.981 ; 157.708,123.556 157.708,123.962 ; 157.708,124.749 157.708,124.953 ; 157.708,126.045 157.708,126.35 ; 157.708,127.137 157.708,127.747 ; 157.708,128.229 157.708,128.432 ; 157.708,129.118 157.708,129.728 ; 157.708,130.109 157.708,130.82 ; 157.708,130.922 157.708,131.404 ; 157.708,132.598 157.708,133.589 ; 157.733,113.624 157.733,114.513 ; 157.733,115.326 157.733,116.215 ; 157.733,117.409 157.733,117.891 ; 157.733,118.984 157.733,119.288 ; 157.733,119.796 157.733,121.473 ; 157.733,121.778 157.733,121.981 ; 157.733,123.556 157.733,123.962 ; 157.733,124.749 157.733,124.953 ; 157.733,126.045 157.733,126.35 ; 157.733,127.137 157.733,127.747 ; 157.733,128.229 157.733,128.432 ; 157.733,129.118 157.733,129.728 ; 157.733,130.109 157.733,130.82 ; 157.733,130.922 157.733,131.404 ; 157.733,132.598 157.733,133.589 ; 157.759,113.624 157.759,114.513 ; 157.759,115.326 157.759,116.215 ; 157.759,117.409 157.759,117.891 ; 157.759,118.984 157.759,119.288 ; 157.759,119.796 157.759,121.473 ; 157.759,121.778 157.759,121.981 ; 157.759,123.556 157.759,123.962 ; 157.759,124.749 157.759,124.953 ; 157.759,126.045 157.759,126.35 ; 157.759,127.137 157.759,127.747 ; 157.759,128.229 157.759,128.432 ; 157.759,129.118 157.759,129.728 ; 157.759,130.109 157.759,130.82 ; 157.759,130.922 157.759,131.404 ; 157.759,132.598 157.759,133.589 ; 157.784,113.624 157.784,114.513 ; 157.784,115.326 157.784,116.215 ; 157.784,117.409 157.784,117.891 ; 157.784,118.984 157.784,119.288 ; 157.784,119.796 157.784,121.473 ; 157.784,121.778 157.784,121.981 ; 157.784,123.556 157.784,123.962 ; 157.784,124.749 157.784,124.953 ; 157.784,126.045 157.784,126.35 ; 157.784,127.137 157.784,127.747 ; 157.784,128.229 157.784,128.432 ; 157.784,129.118 157.784,129.728 ; 157.784,130.109 157.784,130.82 ; 157.784,130.922 157.784,131.404 ; 157.784,132.598 157.784,133.589 ; 157.81,113.624 157.81,114.513 ; 157.81,115.326 157.81,116.215 ; 157.81,117.409 157.81,117.891 ; 157.81,118.984 157.81,119.288 ; 157.81,119.796 157.81,121.473 ; 157.81,121.778 157.81,121.981 ; 157.81,123.556 157.81,123.962 ; 157.81,124.749 157.81,124.953 ; 157.81,126.045 157.81,126.35 ; 157.81,127.137 157.81,127.747 ; 157.81,128.229 157.81,128.432 ; 157.81,129.118 157.81,129.728 ; 157.81,130.109 157.81,130.82 ; 157.81,130.922 157.81,131.404 ; 157.81,132.598 157.81,133.589 ; 157.835,113.624 157.835,114.513 ; 157.835,115.326 157.835,116.215 ; 157.835,117.409 157.835,117.891 ; 157.835,118.984 157.835,119.288 ; 157.835,119.796 157.835,121.473 ; 157.835,121.778 157.835,121.981 ; 157.835,123.556 157.835,123.962 ; 157.835,124.749 157.835,124.953 ; 157.835,126.045 157.835,126.35 ; 157.835,127.137 157.835,127.747 ; 157.835,128.229 157.835,128.432 ; 157.835,129.118 157.835,129.728 ; 157.835,130.109 157.835,130.82 ; 157.835,130.922 157.835,131.404 ; 157.835,132.598 157.835,133.589 ; 157.86,113.624 157.86,114.513 ; 157.86,115.326 157.86,116.215 ; 157.86,117.409 157.86,117.891 ; 157.86,118.984 157.86,119.288 ; 157.86,119.796 157.86,121.473 ; 157.86,121.778 157.86,121.981 ; 157.86,123.556 157.86,123.962 ; 157.86,124.749 157.86,124.953 ; 157.86,126.045 157.86,126.35 ; 157.86,127.137 157.86,127.747 ; 157.86,128.229 157.86,128.432 ; 157.86,129.118 157.86,129.728 ; 157.86,130.109 157.86,130.82 ; 157.86,130.922 157.86,131.404 ; 157.86,132.598 157.86,133.589 ; 157.886,113.624 157.886,114.513 ; 157.886,115.326 157.886,116.215 ; 157.886,117.409 157.886,117.891 ; 157.886,118.984 157.886,119.288 ; 157.886,119.796 157.886,121.473 ; 157.886,121.778 157.886,121.981 ; 157.886,123.556 157.886,123.962 ; 157.886,124.749 157.886,124.953 ; 157.886,126.045 157.886,126.35 ; 157.886,127.137 157.886,127.747 ; 157.886,128.229 157.886,128.432 ; 157.886,129.118 157.886,129.728 ; 157.886,130.109 157.886,130.82 ; 157.886,130.922 157.886,131.404 ; 157.886,132.598 157.886,133.589 ; 157.911,113.624 157.911,114.513 ; 157.911,115.326 157.911,116.215 ; 157.911,117.409 157.911,117.891 ; 157.911,118.984 157.911,119.288 ; 157.911,119.796 157.911,121.473 ; 157.911,121.778 157.911,121.981 ; 157.911,123.556 157.911,123.962 ; 157.911,124.749 157.911,124.953 ; 157.911,126.045 157.911,126.35 ; 157.911,127.137 157.911,127.747 ; 157.911,128.229 157.911,128.432 ; 157.911,129.118 157.911,129.728 ; 157.911,130.109 157.911,130.82 ; 157.911,130.922 157.911,131.404 ; 157.911,132.598 157.911,133.589 ; 157.937,113.624 157.937,114.513 ; 157.937,115.326 157.937,116.215 ; 157.937,117.409 157.937,117.891 ; 157.937,118.984 157.937,119.288 ; 157.937,119.796 157.937,121.473 ; 157.937,121.778 157.937,121.981 ; 157.937,123.556 157.937,123.962 ; 157.937,124.749 157.937,124.953 ; 157.937,126.045 157.937,126.35 ; 157.937,127.137 157.937,127.747 ; 157.937,128.229 157.937,128.432 ; 157.937,129.118 157.937,129.728 ; 157.937,130.109 157.937,130.82 ; 157.937,130.922 157.937,131.404 ; 157.937,132.598 157.937,133.589 ; 157.962,113.624 157.962,114.513 ; 157.962,115.326 157.962,116.215 ; 157.962,117.409 157.962,117.891 ; 157.962,118.984 157.962,119.288 ; 157.962,119.796 157.962,121.473 ; 157.962,121.778 157.962,121.981 ; 157.962,123.556 157.962,123.962 ; 157.962,124.749 157.962,124.953 ; 157.962,126.045 157.962,126.35 ; 157.962,127.137 157.962,127.747 ; 157.962,128.229 157.962,128.432 ; 157.962,129.118 157.962,129.728 ; 157.962,130.109 157.962,130.82 ; 157.962,130.922 157.962,131.404 ; 157.962,132.598 157.962,133.589 ; 157.987,113.624 157.987,114.513 ; 157.987,115.326 157.987,116.215 ; 157.987,117.409 157.987,117.891 ; 157.987,118.984 157.987,119.288 ; 157.987,119.796 157.987,121.473 ; 157.987,121.778 157.987,121.981 ; 157.987,123.556 157.987,123.962 ; 157.987,124.749 157.987,124.953 ; 157.987,126.045 157.987,126.35 ; 157.987,127.137 157.987,127.747 ; 157.987,128.229 157.987,128.432 ; 157.987,129.118 157.987,129.728 ; 157.987,130.109 157.987,130.82 ; 157.987,130.922 157.987,131.404 ; 157.987,132.598 157.987,133.589 ; 158.013,113.624 158.013,114.513 ; 158.013,115.326 158.013,116.215 ; 158.013,117.409 158.013,117.891 ; 158.013,118.984 158.013,119.288 ; 158.013,119.796 158.013,121.473 ; 158.013,121.778 158.013,121.981 ; 158.013,123.556 158.013,123.962 ; 158.013,124.749 158.013,124.953 ; 158.013,126.045 158.013,126.35 ; 158.013,127.137 158.013,127.747 ; 158.013,128.229 158.013,128.432 ; 158.013,129.118 158.013,129.728 ; 158.013,130.109 158.013,130.82 ; 158.013,130.922 158.013,131.404 ; 158.013,132.598 158.013,133.589 ; 158.038,113.624 158.038,114.513 ; 158.038,115.326 158.038,116.215 ; 158.038,117.409 158.038,117.891 ; 158.038,118.984 158.038,119.288 ; 158.038,119.796 158.038,121.473 ; 158.038,121.778 158.038,121.981 ; 158.038,123.556 158.038,123.962 ; 158.038,124.749 158.038,124.953 ; 158.038,126.045 158.038,126.35 ; 158.038,127.137 158.038,127.747 ; 158.038,128.229 158.038,128.432 ; 158.038,129.118 158.038,129.728 ; 158.038,130.109 158.038,130.82 ; 158.038,130.922 158.038,131.404 ; 158.038,132.598 158.038,133.589 ; 158.064,113.624 158.064,114.513 ; 158.064,115.326 158.064,116.215 ; 158.064,117.409 158.064,117.891 ; 158.064,118.984 158.064,119.288 ; 158.064,119.796 158.064,121.473 ; 158.064,121.778 158.064,121.981 ; 158.064,123.556 158.064,123.962 ; 158.064,124.749 158.064,124.953 ; 158.064,126.045 158.064,126.35 ; 158.064,127.137 158.064,127.747 ; 158.064,128.229 158.064,128.432 ; 158.064,129.118 158.064,129.728 ; 158.064,130.109 158.064,130.82 ; 158.064,130.922 158.064,131.404 ; 158.064,132.598 158.064,133.589 ; 158.089,113.624 158.089,114.513 ; 158.089,115.326 158.089,116.215 ; 158.089,117.409 158.089,117.891 ; 158.089,118.984 158.089,119.288 ; 158.089,119.796 158.089,121.473 ; 158.089,121.778 158.089,121.981 ; 158.089,123.556 158.089,123.962 ; 158.089,124.749 158.089,124.953 ; 158.089,126.045 158.089,126.35 ; 158.089,127.137 158.089,127.747 ; 158.089,128.229 158.089,128.432 ; 158.089,129.118 158.089,129.728 ; 158.089,130.109 158.089,130.82 ; 158.089,130.922 158.089,131.404 ; 158.089,132.598 158.089,133.589 ; 158.114,113.624 158.114,114.513 ; 158.114,115.326 158.114,116.215 ; 158.114,117.409 158.114,117.891 ; 158.114,118.984 158.114,119.288 ; 158.114,119.796 158.114,121.473 ; 158.114,121.778 158.114,121.981 ; 158.114,123.556 158.114,123.962 ; 158.114,124.749 158.114,124.953 ; 158.114,126.045 158.114,126.35 ; 158.114,127.137 158.114,127.747 ; 158.114,128.229 158.114,128.432 ; 158.114,129.118 158.114,129.728 ; 158.114,130.109 158.114,130.82 ; 158.114,130.922 158.114,131.404 ; 158.114,132.598 158.114,133.589 ; 158.14,113.624 158.14,114.513 ; 158.14,115.326 158.14,116.215 ; 158.14,117.409 158.14,117.891 ; 158.14,118.984 158.14,119.288 ; 158.14,119.796 158.14,120.177 ; 158.14,121.778 158.14,121.981 ; 158.14,123.556 158.14,123.962 ; 158.14,124.749 158.14,124.953 ; 158.14,126.045 158.14,126.35 ; 158.14,127.137 158.14,127.747 ; 158.14,128.229 158.14,128.432 ; 158.14,129.118 158.14,129.728 ; 158.14,130.109 158.14,130.82 ; 158.14,130.922 158.14,131.404 ; 158.14,133.106 158.14,133.792 ; 158.165,113.624 158.165,114.513 ; 158.165,115.326 158.165,116.215 ; 158.165,117.409 158.165,117.891 ; 158.165,118.984 158.165,119.288 ; 158.165,119.796 158.165,120.177 ; 158.165,121.778 158.165,121.981 ; 158.165,123.556 158.165,123.962 ; 158.165,124.749 158.165,124.953 ; 158.165,126.045 158.165,126.35 ; 158.165,127.137 158.165,127.747 ; 158.165,128.229 158.165,128.432 ; 158.165,129.118 158.165,129.728 ; 158.165,130.109 158.165,130.82 ; 158.165,130.922 158.165,131.404 ; 158.165,133.106 158.165,133.792 ; 158.191,113.624 158.191,114.513 ; 158.191,115.326 158.191,116.215 ; 158.191,117.409 158.191,117.891 ; 158.191,118.984 158.191,119.288 ; 158.191,119.796 158.191,120.177 ; 158.191,121.778 158.191,121.981 ; 158.191,123.556 158.191,123.962 ; 158.191,124.749 158.191,124.953 ; 158.191,126.045 158.191,126.35 ; 158.191,127.137 158.191,127.747 ; 158.191,128.229 158.191,128.432 ; 158.191,129.118 158.191,129.728 ; 158.191,130.109 158.191,130.82 ; 158.191,130.922 158.191,131.404 ; 158.191,133.106 158.191,133.792 ; 158.216,113.624 158.216,114.513 ; 158.216,115.326 158.216,116.215 ; 158.216,117.409 158.216,117.891 ; 158.216,118.984 158.216,119.288 ; 158.216,119.796 158.216,120.177 ; 158.216,121.778 158.216,121.981 ; 158.216,123.556 158.216,123.962 ; 158.216,124.749 158.216,124.953 ; 158.216,126.045 158.216,126.35 ; 158.216,127.137 158.216,127.747 ; 158.216,128.229 158.216,128.432 ; 158.216,129.118 158.216,129.728 ; 158.216,130.109 158.216,130.82 ; 158.216,130.922 158.216,131.404 ; 158.216,133.106 158.216,133.792 ; 158.241,113.624 158.241,114.513 ; 158.241,115.326 158.241,116.215 ; 158.241,117.409 158.241,117.891 ; 158.241,118.984 158.241,119.288 ; 158.241,119.796 158.241,120.177 ; 158.241,121.778 158.241,121.981 ; 158.241,123.556 158.241,123.962 ; 158.241,124.749 158.241,124.953 ; 158.241,126.045 158.241,126.35 ; 158.241,127.137 158.241,127.747 ; 158.241,128.229 158.241,128.432 ; 158.241,129.118 158.241,129.728 ; 158.241,130.109 158.241,130.82 ; 158.241,130.922 158.241,131.404 ; 158.241,133.106 158.241,133.792 ; 158.267,113.624 158.267,114.513 ; 158.267,115.326 158.267,116.215 ; 158.267,117.409 158.267,117.891 ; 158.267,118.984 158.267,119.288 ; 158.267,119.796 158.267,120.177 ; 158.267,121.778 158.267,121.981 ; 158.267,123.556 158.267,123.962 ; 158.267,124.749 158.267,124.953 ; 158.267,126.045 158.267,126.35 ; 158.267,127.137 158.267,127.747 ; 158.267,128.229 158.267,128.432 ; 158.267,129.118 158.267,129.728 ; 158.267,130.109 158.267,130.82 ; 158.267,130.922 158.267,131.404 ; 158.267,133.106 158.267,133.792 ; 158.292,113.624 158.292,114.513 ; 158.292,115.326 158.292,116.215 ; 158.292,117.409 158.292,117.891 ; 158.292,118.984 158.292,119.288 ; 158.292,119.796 158.292,120.177 ; 158.292,121.778 158.292,121.981 ; 158.292,123.556 158.292,123.962 ; 158.292,124.749 158.292,124.953 ; 158.292,126.045 158.292,126.35 ; 158.292,127.137 158.292,127.747 ; 158.292,128.229 158.292,128.432 ; 158.292,129.118 158.292,129.728 ; 158.292,130.109 158.292,130.82 ; 158.292,130.922 158.292,131.404 ; 158.292,133.106 158.292,133.792 ; 158.318,113.624 158.318,114.513 ; 158.318,115.326 158.318,116.215 ; 158.318,117.409 158.318,117.891 ; 158.318,118.984 158.318,119.288 ; 158.318,119.796 158.318,120.177 ; 158.318,121.778 158.318,121.981 ; 158.318,123.556 158.318,123.962 ; 158.318,124.749 158.318,124.953 ; 158.318,126.045 158.318,126.35 ; 158.318,127.137 158.318,127.747 ; 158.318,128.229 158.318,128.432 ; 158.318,129.118 158.318,129.728 ; 158.318,130.109 158.318,130.82 ; 158.318,130.922 158.318,131.404 ; 158.318,133.106 158.318,133.792 ; 158.343,113.624 158.343,114.513 ; 158.343,115.326 158.343,116.215 ; 158.343,117.409 158.343,117.891 ; 158.343,118.984 158.343,119.288 ; 158.343,119.796 158.343,120.177 ; 158.343,121.778 158.343,121.981 ; 158.343,123.556 158.343,123.962 ; 158.343,124.749 158.343,124.953 ; 158.343,126.045 158.343,126.35 ; 158.343,127.137 158.343,127.747 ; 158.343,128.229 158.343,128.432 ; 158.343,129.118 158.343,129.728 ; 158.343,130.109 158.343,130.82 ; 158.343,130.922 158.343,131.404 ; 158.343,133.106 158.343,133.792 ; 158.368,113.624 158.368,114.513 ; 158.368,115.326 158.368,116.215 ; 158.368,117.409 158.368,117.891 ; 158.368,118.984 158.368,119.288 ; 158.368,119.796 158.368,120.177 ; 158.368,121.778 158.368,121.981 ; 158.368,123.556 158.368,123.962 ; 158.368,124.749 158.368,124.953 ; 158.368,126.045 158.368,126.35 ; 158.368,127.137 158.368,127.747 ; 158.368,128.229 158.368,128.432 ; 158.368,129.118 158.368,129.728 ; 158.368,130.109 158.368,130.82 ; 158.368,130.922 158.368,131.404 ; 158.368,133.106 158.368,133.792 ; 158.394,113.624 158.394,114.513 ; 158.394,115.326 158.394,116.215 ; 158.394,117.409 158.394,117.891 ; 158.394,118.984 158.394,119.288 ; 158.394,119.796 158.394,120.177 ; 158.394,121.778 158.394,121.981 ; 158.394,123.556 158.394,123.962 ; 158.394,124.749 158.394,124.953 ; 158.394,126.045 158.394,126.35 ; 158.394,127.137 158.394,127.747 ; 158.394,128.229 158.394,128.432 ; 158.394,129.118 158.394,129.728 ; 158.394,130.109 158.394,130.82 ; 158.394,130.922 158.394,131.404 ; 158.394,133.106 158.394,133.792 ; 158.419,113.624 158.419,114.513 ; 158.419,115.326 158.419,116.215 ; 158.419,117.409 158.419,117.891 ; 158.419,118.984 158.419,119.288 ; 158.419,119.796 158.419,120.177 ; 158.419,121.778 158.419,121.981 ; 158.419,123.556 158.419,123.962 ; 158.419,124.749 158.419,124.953 ; 158.419,126.045 158.419,126.35 ; 158.419,127.137 158.419,127.747 ; 158.419,128.229 158.419,128.432 ; 158.419,129.118 158.419,129.728 ; 158.419,130.109 158.419,130.82 ; 158.419,130.922 158.419,131.404 ; 158.419,133.106 158.419,133.792 ; 158.445,113.624 158.445,114.513 ; 158.445,115.326 158.445,116.215 ; 158.445,117.409 158.445,117.891 ; 158.445,118.984 158.445,119.288 ; 158.445,119.796 158.445,120.177 ; 158.445,121.778 158.445,121.981 ; 158.445,123.556 158.445,123.962 ; 158.445,124.749 158.445,124.953 ; 158.445,126.045 158.445,126.35 ; 158.445,127.137 158.445,127.747 ; 158.445,128.229 158.445,128.432 ; 158.445,129.118 158.445,129.728 ; 158.445,130.109 158.445,130.82 ; 158.445,130.922 158.445,131.404 ; 158.445,133.106 158.445,133.792 ; 158.47,113.624 158.47,114.513 ; 158.47,115.326 158.47,116.215 ; 158.47,117.409 158.47,117.891 ; 158.47,118.984 158.47,119.288 ; 158.47,120.076 158.47,120.177 ; 158.47,121.778 158.47,121.981 ; 158.47,123.556 158.47,123.962 ; 158.47,124.749 158.47,124.953 ; 158.47,126.045 158.47,126.35 ; 158.47,127.137 158.47,127.747 ; 158.47,128.229 158.47,128.432 ; 158.47,129.118 158.47,129.728 ; 158.47,130.109 158.47,130.82 ; 158.47,130.922 158.47,131.404 ; 158.47,133.487 158.47,133.792 ; 158.495,113.624 158.495,114.513 ; 158.495,115.326 158.495,116.215 ; 158.495,117.409 158.495,117.891 ; 158.495,118.984 158.495,119.288